# Altium PCB Tutorial Project.PcbDoc
Units mm, origin at the board's own origin, x right, y up, seen from the top; angles counter-clockwise.
Board outline 27.56 x 14.6 mm, 2 copper layers (Top Layer, Bottom Layer), stack 1.671 mm thick; 3 components, 3 nets, 6 pads, 0 vias.
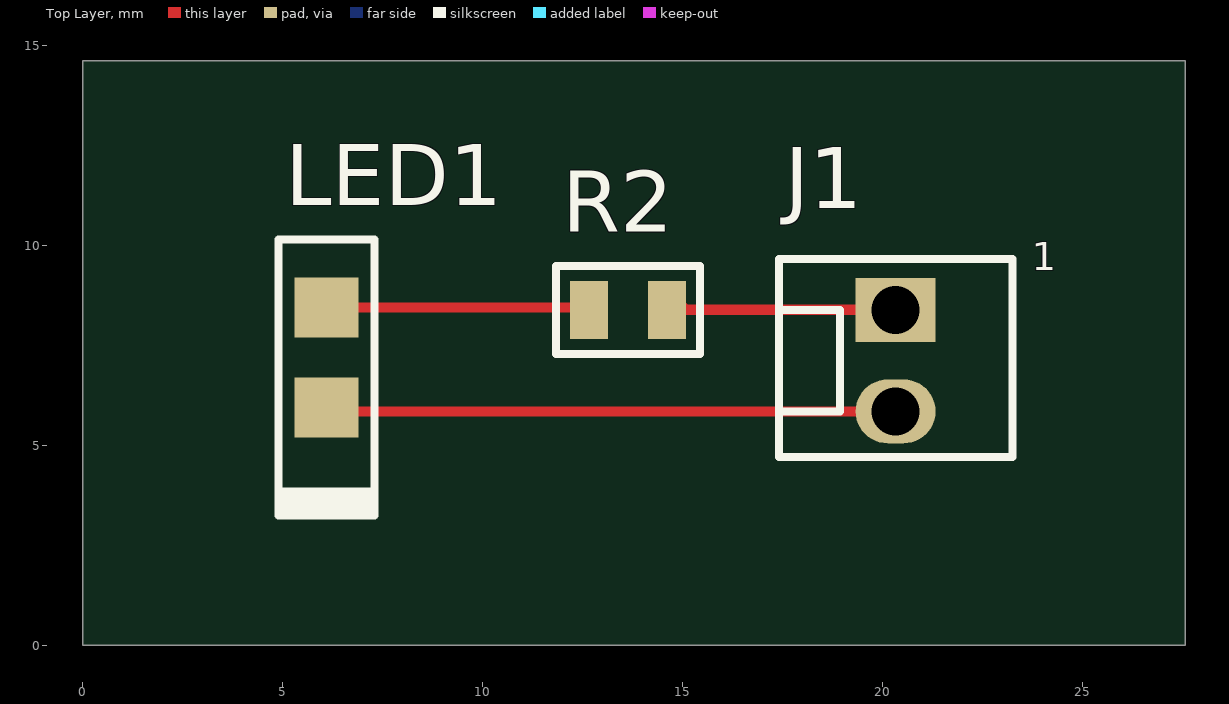
[diagram p0: Top Layer view]
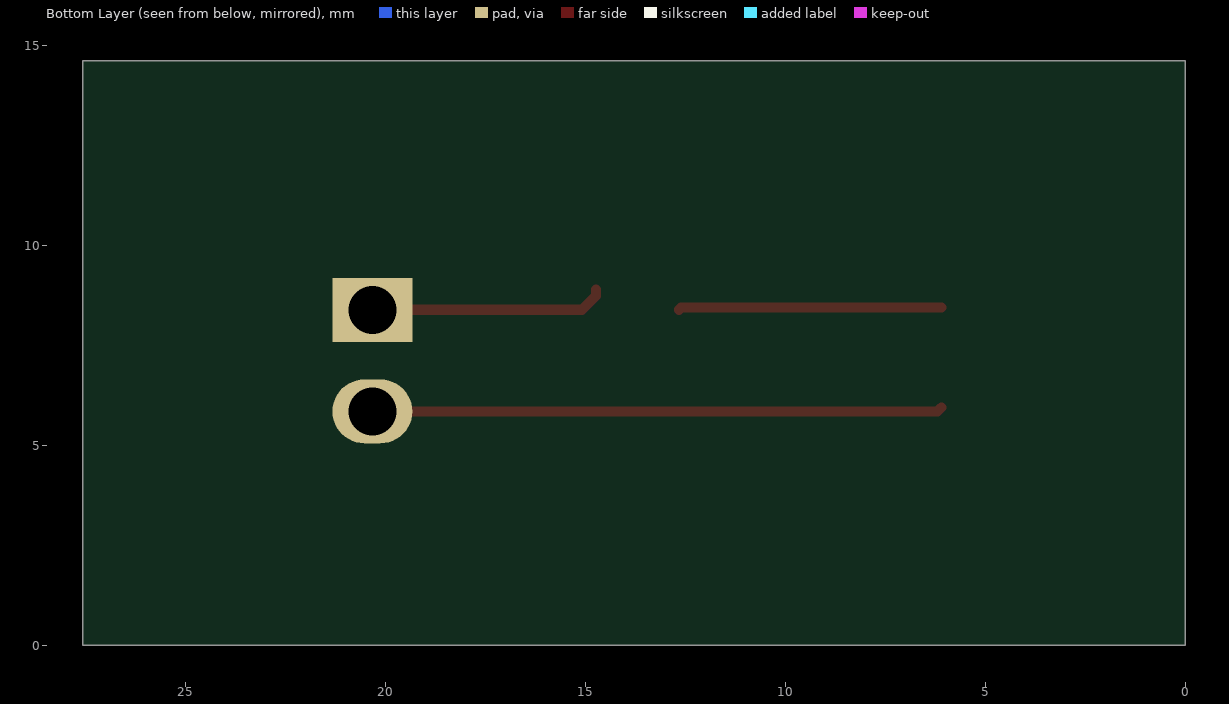
[diagram p1: Bottom Layer view, seen from below]
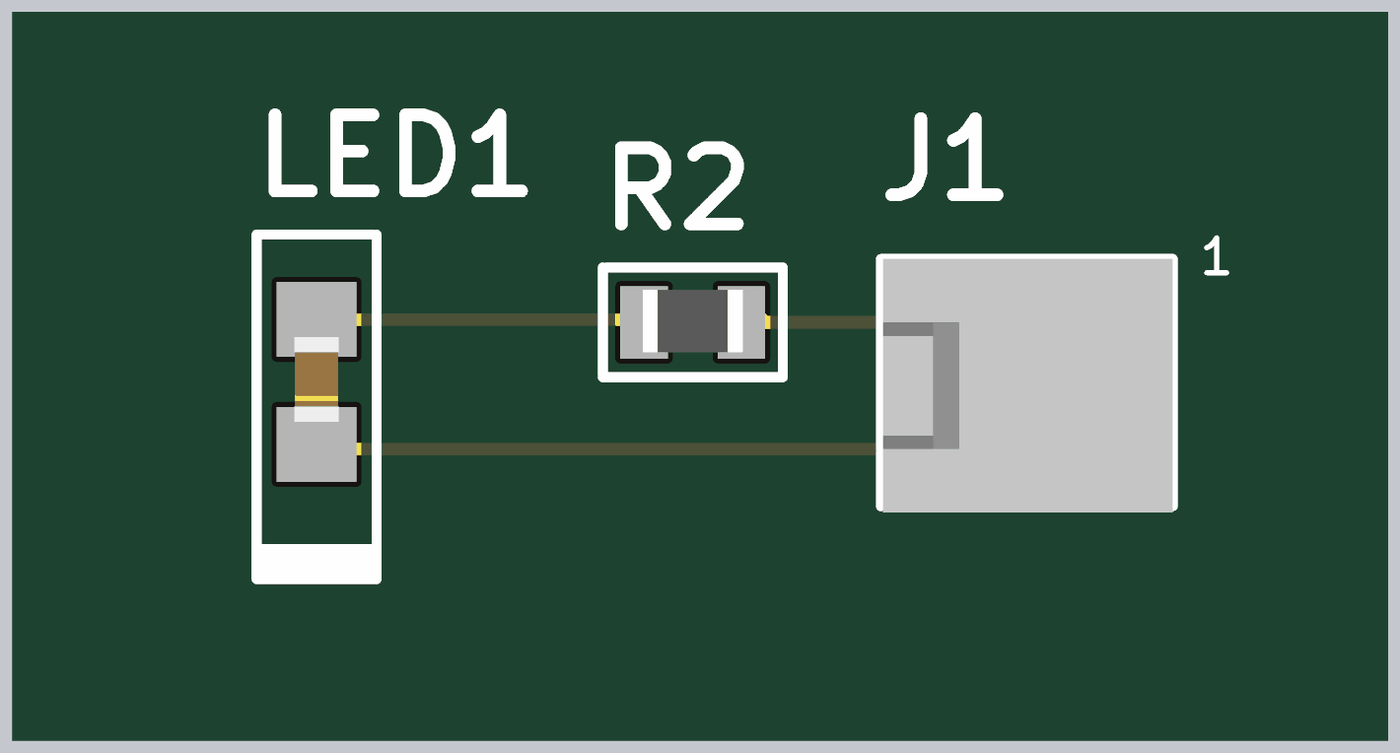
[diagram p2: 3D render of the assembled board from above, using the file's embedded part models]

## Layer stack, top to bottom
Top Solder: solder mask 0.0102, Solder Resist, Dk 3.5
Top Layer: signal copper 0.0356
Dielectric 1: dielectric 1.6, FR-4, Dk 4.8
Bottom Layer: signal copper 0.0356
Bottom Solder: solder mask 0.0102, Solder Resist, Dk 3.5

## Board outline
0,0 27.559,0 27.559,14.605 0,14.605

## Design rules (kind name [scope] priority, off if disabled: settings)
Clearance [All] p1: gap=0.3 ignorepadtopadclearanceinfootprint=FALSE
PolygonConnect [All] p1: connectstyle=Relief reliefconductorwidth=0.254 reliefentries=4 polygonreliefangle="90 Angle" airgapwidth=0.254
RoutingVias [All] p1: holewidth=0.711 width=1.27 viastyle="Through Hole" minholewidth=0.711 minwidth=1.27 maxholewidth=0.711 maxwidth=1.27
SolderMaskExpansion [All] p1: expansion=0.102 istentingtop=FALSE
Width [All] p1: maxlimit=0.254 minlimit=0.254 preferedwidth=0.254
30 further rules are at their usual default settings.

## Components (designator, comment, footprint, x,y, rotation, side; value= is the part's Value field where it differs from the comment)
J1 "1x2 Header" HDR1X2 20.32,8.382 r0 top
LED1 "GREEN" LED1206 6.096,7.239 r90 top
R2 "360R" Resistor 13.63,8.382 r0 top

## Footprints (in the part's own frame and the unit in brackets; to place one, negate y for a bottom-side part, rotate by r counter-clockwise, add the part's x,y. Pads: shape width x height; smd on the part's side, far side on the other; paste and mask are expansions set on the pad)
HDR1X2 [mm]
  rect 2x1.6 hole 1.2: 1(0,0)
  oval 2x1.6 hole 1.2: 2(0,-2.54)
  silkscreen extent -2.92,-3.68 2.92,1.27, body extent -2.88,-3.81 2.92,1.27, height 11.71
LED1206 [mm]
  rect 1.5x1.6 smd: 1(-1.3,0) 2(1.2,0)
  silkscreen extent -4,-1.2 2.9,1.2, body extent -0.85,-0.44 0.85,0.44, height 0.51
Resistor [mm]
  rect 0.95x1.45 smd: 1(-0.975,0) 2(0.975,0)
  silkscreen extent -1.8,-1.1 1.8,1.1, body extent -1,-0.6 1,0.65, height 0.51

## Part data
J1: library part 0022292021, "Board Connector, 2 Contact(s), 1 Row(s), Male, Straight, Solder Terminal", Manufacturer=Molex, Supplier Part Number=26AC6573, Category="Connectors, Interconnects", Manufacturer Part Number=0022292021, Pricing="1=0.53, 10=0.45, 25=0.408, 50=0.375, 100=0.343, 250=0.335 (USD)", RoHS=No, Stock=37058, Supplier=Newark
LED1: library part 156120VS82500, "Single Color LED", Manufacturer="Wurth Electronics", Supplier Part Number=22AC3294, Category=LEDs, ComponentLink1Description=https://datasheet.ciiva.com:443/pdfs/VipMasterIC/IC/MIDC/MIDC-S-A0007332242/MIDC-S-A0007332242-1.pdf?src-supplier=IHS+Markit, ComponentLink1URL=https://datasheet.ciiva.com:443/pdfs/VipMasterIC/IC/MIDC/MIDC-S-A0007332242/MIDC-S-A0007332242-1.pdf?src-supplier=IHS+Markit, ComponentLink2Description=http://www.farnell.com/datasheets/2301743.pdf?src-supplier=Farnell, ComponentLink2URL=http://www.farnell.com/datasheets/2301743.pdf?src-supplier=Farnell, ComponentLink3Description=https://katalog.we-online.de/led/datasheet/156120VS82500.pdf?src-supplier=Digi-Key, ComponentLink3URL=https://katalog.we-online.de/led/datasheet/156120VS82500.pdf?src-supplier=Digi-Key, ComponentLink4Description=http://www.farnell.com/datasheets/2301743.pdf?src-supplier=Newark, ComponentLink4URL=http://www.farnell.com/datasheets/2301743.pdf?src-supplier=Newark, Manufacturer Part Number=156120VS82500, Optoelectronic Device Type="SINGLE COLOR LED", Pricing="5=0.449, 10=0.445, 25=0.405, 50=0.365, 100=0.261 (USD)", Reach SVHC Compliant=Yes, RoHS=Yes, RoHS Compliant=Yes, Stock=97, Supplier=Newark
R2: library part CRCW0805360RFKEA, "Fixed Resistor, Metal Glaze/thick Film, 0.125W, 360ohm, 150V, 1% +/-Tol, 100ppm/Cel, Surface Mount, 0805", Case/Package=0805, Manufacturer=Vishay, Max Operating Temperature=155°C, Min Operating Temperature=-55°C, Package Height=0.45mm, Package Length=2mm, Package Shape=Rectangular, Package Style=SMTMeter, Package Width=1.25mm, Power=125mW, Rated Temperature=70°C, Resistor Type="FIXED RESISTOR", Temperature Coefficient=100ppm/°C, Tolerance=1%, Working Voltage=150V, Category="Chip SMD Resistors", ComponentLink1Description=https://datasheet.ciiva.com:443/pdfs/VipMasterIC/IC/VISH/VISH-S-A0007266705/VISH-S-A0007266705-1.pdf?src-supplier=IHS+Markit, ComponentLink1URL=https://datasheet.ciiva.com:443/pdfs/VipMasterIC/IC/VISH/VISH-S-A0007266705/VISH-S-A0007266705-1.pdf?src-supplier=IHS+Markit, ComponentLink2Description=https://datasheet.ciiva.com/2467/dcrcwe3-2467773.pdf?src-supplier=Digi-Key, ComponentLink2URL=https://datasheet.ciiva.com/2467/dcrcwe3-2467773.pdf?src-supplier=Digi-Key, Construction=Chip, JESD-609 Code=e3, Manufacturer Part Number=CRCW0805360RFKEA, Mounting Technology="Surface Mount", Packaging="Tape and Reel", Pins=2, Pricing="1=0.0772 (USD)", Reach SVHC Compliant=Yes, Reference Standard=AEC-Q200, RoHS=Yes, RoHS Compliant=Yes, Stock=2, Supplier="Arrow Electronics", Supplier Part Number=CRCW0805360RFKEA, Technology="METAL GLAZE/THICK FILM", Terminal Finish=Nickel, Termination=Wraparound

## Nets (pads, with @x,y where several pads share a name; then routed paths per layer and width w, separated by ;. In a path a pad name is that pad's centre, name@x,y a point inside that pad or via, vN(x,y) a via of type N, cw(c..) or ccw(c..) an arc to the next point about the centre after c; other vN are vias at no path point)
+3V3: J1.1 R2.2 | length 5.9
  Top Layer w0.254: R2.2@14.732,8.89 14.732,8.73 15.08,8.382 J1.1
GND: J1.2 LED1.1 | length 14.3
  Top Layer w0.254: LED1.1 6.193,5.842 J1.2
NetLED1_2: LED1.2 R2.1 | length 6.6
  Top Layer w0.254: LED1.2 12.598,8.439 R2.1

## Text inside footprints (layer, text, board x,y; h text height)
J1: Top Overlay "1" at 23.722,9.371 h0.7; Top Assembly "1" at 23.722,9.371 h0.7